# Altium PCB PCB.PcbDoc
Units mm, origin at the board's own origin, x right, y up, seen from the top; angles counter-clockwise.
Board outline 45 x 112 mm, 2 copper layers (Top Layer, Bottom Layer); 5 components, 29 nets, 156 pads, 0 vias.
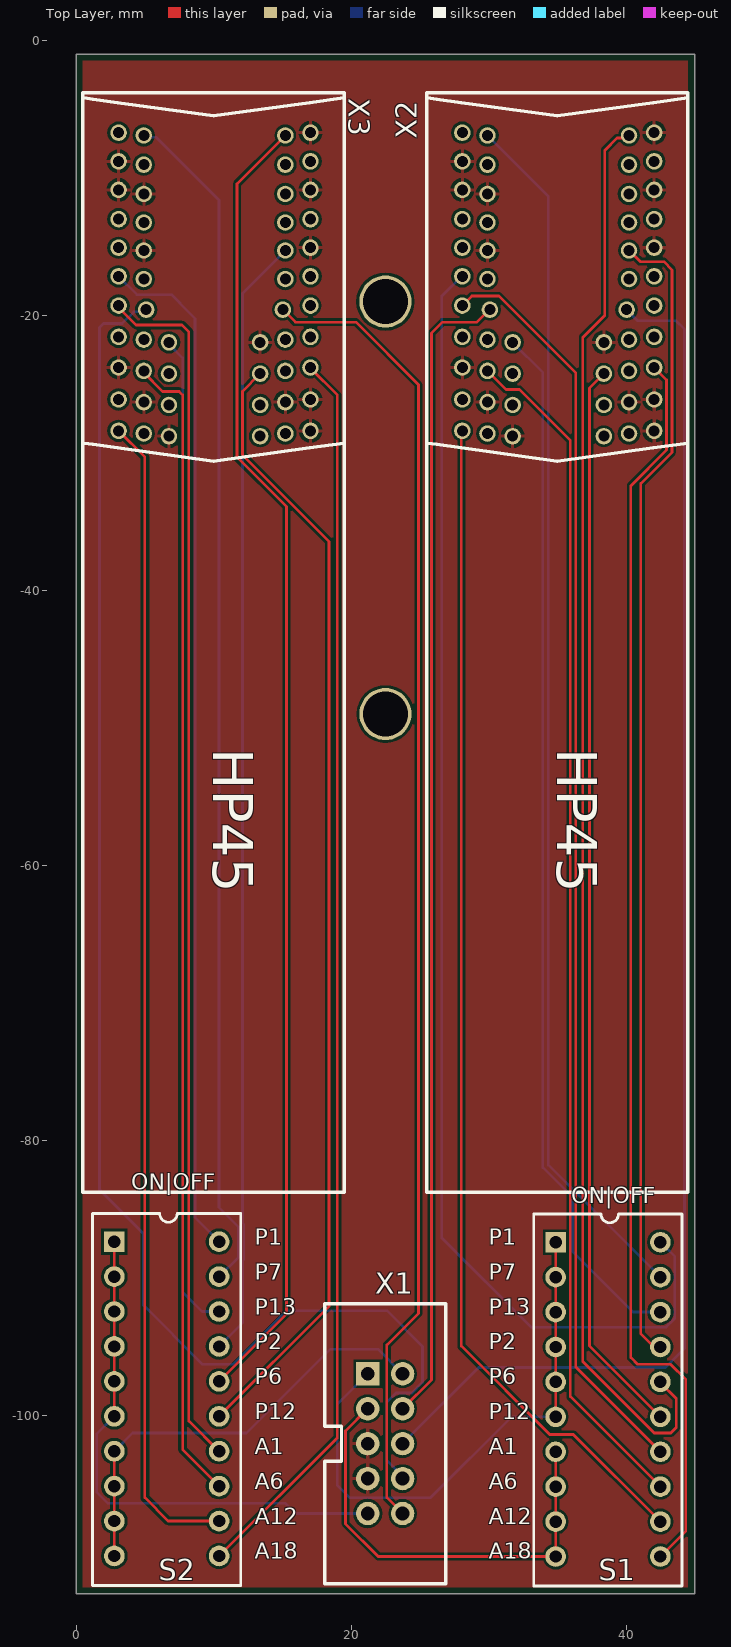
[diagram p0: Top Layer view]
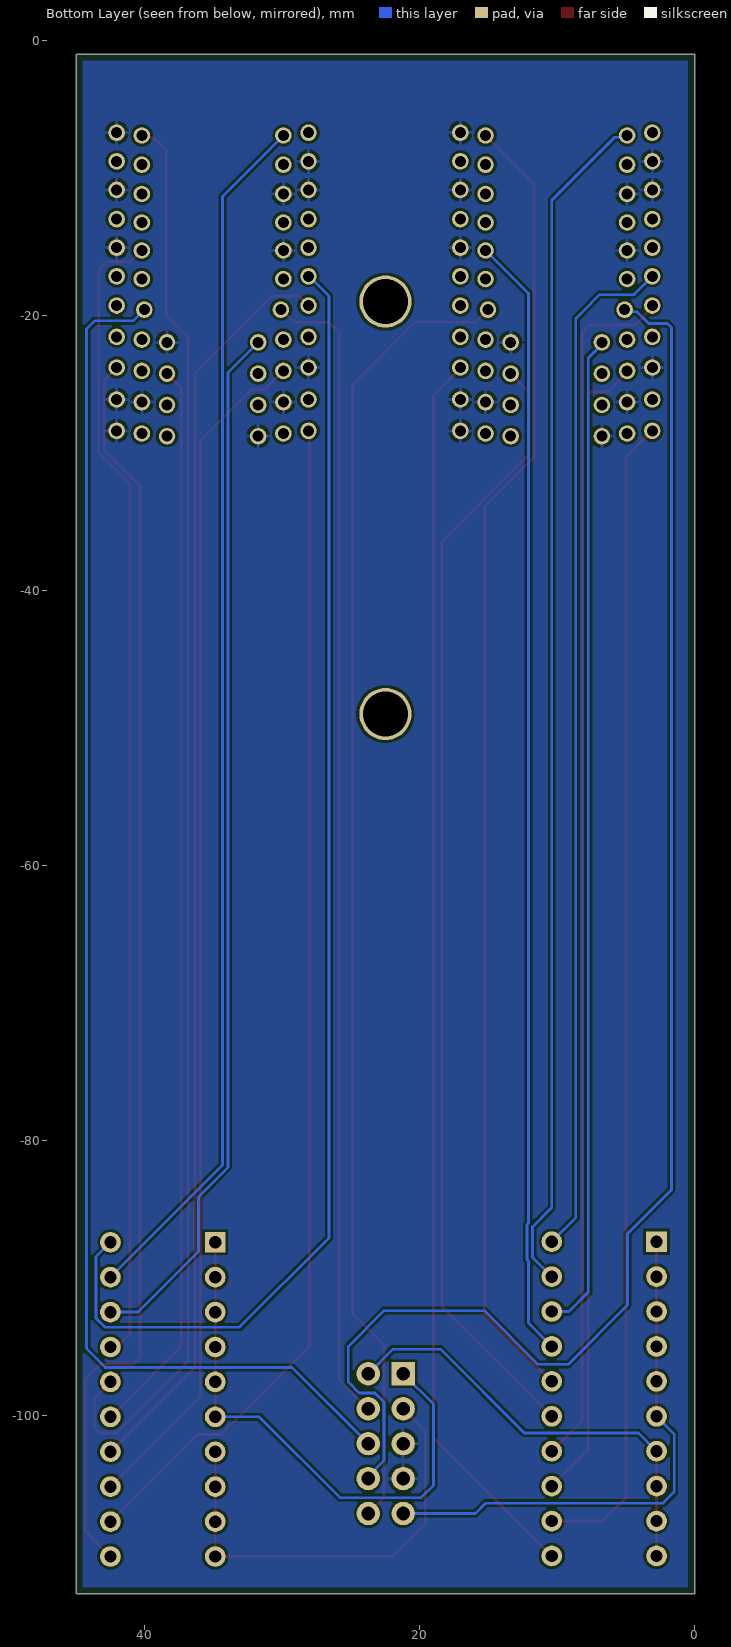
[diagram p1: Bottom Layer view, seen from below]

## Layer stack, top to bottom
Top Solder: solder mask 0.0102, Solder Resist, Dk 3.5
Top Layer: signal copper 0.0356
Dielectric 1: dielectric 0.32, FR-4, Dk 4.8
Bottom Layer: signal copper 0.0356
Bottom Solder: solder mask 0.0102, Solder Resist, Dk 3.5

## Board outline
0,-113 0,-1 45,-1 45,-113

## Design rules (kind name [scope] priority, off if disabled: settings)
Clearance [All] p1: gap=0.2 ignorepadtopadclearanceinfootprint=FALSE except(0: Arc-Hole Track-Hole SMDPad-Hole THPad-Hole Via-Hole Fill-Hole Poly-Hole Region-Hole Text-Hole)
PolygonConnect PolygonConnect_1 [IsVia] p1: connectstyle=Direct reliefconductorwidth=0.254 reliefentries=4 polygonreliefangle="90 Angle" airgapwidth=0.254
PolygonConnect [All] p2: connectstyle=Relief reliefconductorwidth=0.254 reliefentries=4 polygonreliefangle="90 Angle" airgapwidth=0.254
RoutingVias [All] p1: holewidth=0.711 width=1.27 viastyle="Through Hole" minholewidth=0.711 minwidth=1.27 maxholewidth=0.711 maxwidth=1.27
SolderMaskExpansion [All] p1: expansion=0.102 istentingtop=FALSE
Width [All] p1: maxlimit=0.2 minlimit=0.2 preferedwidth=0.2
30 further rules are at their usual default settings.

## Components (designator, comment, footprint, x,y, rotation, side; value= is the part's Value field where it differs from the comment)
S1 "SW-DIP10" DIP-20-KEY 34.88,-87.42 r270 top
S2 "SW-DIP10" DIP-20-KEY 2.78,-87.38 r270 top
X1 "IDC-10" IDC-10 22.48,-102.07 r0 top
X2 "HP45 pogo pin footprint" HP45 44.5,8.2 r180 top
X3 "HP45 pogo pin footprint" HP45 19.5,8.2 r180 top

## Footprints (in the part's own frame and the unit in brackets; to place one, negate y for a bottom-side part, rotate by r counter-clockwise, add the part's x,y. Pads: shape width x height; smd on the part's side, far side on the other; paste and mask are expansions set on the pad)
DIP-20-KEY [mm] "DIP; 16 Leads; Row Spacing 7.62 mm; Pitch 2.54 mm"
  rect 1.5x1.5 hole 0.9: 1(0,0)
  round 1.5 hole 0.9: 2(2.54,0) 3(5.08,0) 4(7.62,0) 5(10.16,0) 6(12.7,0) 7(15.24,0) 8(17.78,0) 9(20.32,0) 10(22.86,0) 11(22.86,7.62) 12(20.32,7.62) 13(17.78,7.62) 14(15.24,7.62) 15(12.7,7.62) 16(10.16,7.62) 17(7.62,7.62) 18(5.08,7.62) 19(2.54,7.62) 20(0,7.62)
  silkscreen extent -2.05,-1.59 25,9.2, body extent -2.29,-1.1 25.29,8.68, height 8.25
HP45 [mm]
  round 1.2 hole 0.8: 1(16.409,14.919) 2(2.45,14.919) 3(14.577,15.117) 4(4.281,15.117) 5(16.409,16.998) 6(2.45,16.998) 7(14.577,17.246) 8(4.281,17.246) 9(16.409,19.077) 10(2.45,19.077) 11(14.577,19.374) 12(4.281,19.374) 13(16.409,21.205) 14(2.45,21.206) 15(14.577,21.453) 16(4.281,21.453) 17(16.409,23.285) 18(2.45,23.285) 19(14.577,23.483) 20(4.281,23.483) 21(16.409,25.364) 22(2.45,25.364) 23(14.577,25.562) 24(4.281,25.562) 25(16.409,27.492) 26(2.45,27.492) 27(14.399,27.789) 28(4.46,27.789) 29(16.409,29.769) 30(2.45,29.769) 31(14.577,29.967) 32(4.281,29.967) 33(12.746,30.165) 34(6.113,30.165) 35(16.409,31.997) 36(2.45,31.997) 37(14.577,32.244) 38(4.281,32.244) 39(12.746,32.442) 40(6.113,32.442) 41(16.409,34.323) 42(2.45,34.323) 43(14.577,34.521) 44(4.281,34.521) 45(12.746,34.719) 46(6.113,34.719) 47(16.409,36.6) 48(2.45,36.6) 49(14.577,36.798) 50(4.281,36.798) 51(12.746,36.996) 52(6.113,36.996)
  silkscreen extent 0,12 19,92
IDC-10 [mm]
  rect 1.7x1.7 hole 1: 1(-1.27,5.08)
  round 1.7 hole 1: 2(1.27,5.08) 3(-1.27,2.54) 4(1.27,2.54) 5(-1.27,0) 6(1.27,0) 7(-1.27,-2.54) 8(1.27,-2.54) 9(-1.27,-5.08) 10(1.27,-5.08)
  silkscreen extent -4.4,-10.18 4.4,10.18, body extent -4.4,-10.1 4.45,10.2, height 8.73

## Part data
S1 S2: "4009 Series DIP Switch, Raised actuator", ComponentLink1Description="Manufacturer Link", ComponentLink1URL=http://www.oupiin.com/prodindx.html#Headers, LatestRevisionDate=17-Dec-2003, LatestRevisionNote="PCB Footprint replaced.", PackageDescription="DIP; 16 Leads; Row Spacing 7.62 mm; Pitch 2.54 mm", PackageReference=DIP-16-KEY, Published=24-Mar-1999, Publisher="Altium Limited"
X1: "разъем 4130"
X2 X3: library part HP45

## Free pads (board coordinates)
  round 3.8 hole 3.25: 153(22.5,-49) 153(22.5,-19)

## Nets (pads, with @x,y where several pads share a name; then routed paths per layer and width w, separated by ;. In a path a pad name is that pad's centre, name@x,y a point inside that pad or via, vN(x,y) a via of type N, cw(c..) or ccw(c..) an arc to the next point about the centre after c; other vN are vias at no path point)
A1: S1.14 X2.25 | length 91.9
  Top Layer w0.2: X2.25 28.783,-18.6 30.75,-18.6 36.35,-24.2 36.35,-63.339 36.35,-96.51 S1.14
A1A: S1.7 S1.8 S1.9 S1.10 X1.3 | length 32.9
  Top Layer w0.2: X1.3 19.6,-101.14 19.6,-107.9 21.98,-110.28 S1.10 S1.9 S1.8 S1.7
A1R: S2.14 X3.25 | length 88.3
  Top Layer w0.2: X3.25 3.091,-19.441 4.35,-20.7 7.7,-20.7 8.2,-21.2 8.2,-100.42 S2.14
A2A: S2.7 S2.8 S2.9 S2.10 X1.2 | length 32.4
  Top Layer w0.2: S2.10 S2.9 S2.8 S2.7
  Bottom Layer w0.2: S2.7 4.1,-101.3 12.4,-101.3 18.5,-95.2 21.96,-95.2 X1.2
A6: S1.13 X2.37 | length 86.9
  Top Layer w0.2: X2.37 31.278,-25.4 32.25,-25.4 35.95,-29.1 35.95,-63.779 35.95,-98.65 S1.13
A6R: S2.13 X3.37 | length 84.1
  Top Layer w0.2: X3.37 4.923,-24.173 6.3,-25.55 7.5,-25.55 7.75,-25.8 7.75,-102.51 S2.13
A12: S1.12 X2.47 | length 86.4
  Top Layer w0.2: X2.47 28.02,-28.471 28.02,-94.97 34.45,-101.4 36.16,-101.4 S1.12
A12R: S2.12 X3.47 | length 84.5
  Top Layer w0.2: X3.47 5,-30.309 5,-106 6.7,-107.7 S2.12
A18: S1.11 X2.36 | length 91.8
  Top Layer w0.2: X2.36 42.95,-24.697 42.95,-29.8 40.35,-32.4 40.35,-95.8 40.85,-96.3 43.25,-96.3 44.35,-97.4 44.35,-108.43 S1.11
A18R: S2.11 X3.36 | length 90.8
  Top Layer w0.2: S2.11 19,-101.64 19,-25.8 17.05,-23.85 X3.36
GND1: X1.5 X1.7 X2.2 X2.5 X2.9 X2.10 X2.11 X2.18 X2.19 X2.34 X2.35 X2.42 X2.43 X2.44 X2.48 X2.51 X3.2 X3.5 X3.9 X3.10 X3.11 X3.18 X3.19 X3.34 X3.35 X3.42 X3.43 X3.44 X3.48 X3.51
P1: S1.20 X2.21 | length 96.5
  Bottom Layer w0.2: X2.21 28.037,-17.164 26.6,-18.6 26.6,-87.1 33.1,-93.6 42.9,-93.6 43.55,-92.95 43.55,-88.47 S1.20
P1A: S1.1 S1.2 S1.3 S1.4 S1.5 S1.6 X1.1 | length 40.4
  Top Layer w0.2: S1.6 S1.5 S1.4 S1.3 S1.2 S1.1
  Bottom Layer w0.2: X1.1 19,-99.2 19,-105.1 19.9,-106 25.8,-106 31.68,-100.12 S1.6
P1R: S2.20 X3.21 | length 74.7
  Bottom Layer w0.2: X3.21 4.427,-18.5 6.933,-18.5 7.55,-19.117 7.55,-19.133 8.65,-20.233 8.65,-85.63 S2.20
P2: S1.17 X2.20 | length 83.9
  Top Layer w0.2: X2.20 41.036,-16.1 42.75,-16.1 43.35,-16.7 43.35,-29.966 41.08,-32.236 41.08,-94.08 42.04,-95.04 S1.17
P2A: S2.1 S2.2 S2.3 S2.4 S2.5 S2.6 X1.9 | length 39.1
  Top Layer w0.2: S2.6 S2.5 S2.4 S2.3 S2.2 S2.1
  Bottom Layer w0.2: S2.6 1.5,-101.36 1.5,-105.6 2.3,-106.4 15.2,-106.4 15.95,-107.15 X1.9
P2R: S2.17 X3.20 | length 82
  Top Layer w0.2: S2.17 S2.17@10.4,-94.8
  Bottom Layer w0.2: S2.17 12.1,-93.3 12.1,-88.786 12.2,-88.686 12.2,-86.134 12.1,-86.034 12.1,-18.401 X3.20
P6: S1.16 X2.4 | length 103.9
  Top Layer w0.2: X2.4 40.027,-7.108 39.342,-7.108 38.45,-8 38.45,-20 36.85,-21.6 36.85,-96.1 42.05,-101.3 43.25,-101.3 43.65,-100.9 43.65,-98.8 42.5,-97.65 S1.16
P6R: S2.16 X3.4 | length 95.6
  Top Layer w0.2: S2.16 15.3,-92.64 15.3,-33.916 11.7,-30.316 11.7,-10.436 X3.4
P7: S1.19 X2.3 | length 88.3
  Bottom Layer w0.2: X2.3 34.35,-11.345 34.35,-81.81 S1.19
P7R: S2.19 X3.3 | length 86.9
  Bottom Layer w0.2: X3.3 5.058,-7.052 5.823,-7.052 10.4,-11.63 10.4,-84.9 11.8,-86.3 11.8,-88.52 S2.19
P12: S1.15 X2.40 | length 78.4
  Top Layer w0.2: X2.40 37.35,-25.279 37.35,-94.97 S1.15
P12R: S2.15 X3.40 | length 82.3
  Top Layer w0.2: S2.15 18.4,-92.08 18.4,-36.45 12.1,-30.15 12.1,-25.529 X3.40
P13: S1.18 X2.33 | length 76.2
  Bottom Layer w0.2: X2.33 33.95,-24.161 33.95,-81.976 36.1,-84.126 36.1,-88.1 40.5,-92.5 S1.18
P13R: S2.18 X3.33 | length 72.7
  Bottom Layer w0.2: X3.33 6.754,-22.104 7.75,-23.1 7.75,-91.05 9.16,-92.46 S2.18
R10X1: X1.6 X2.28 | length 102.3
  Bottom Layer w0.2: X1.6 29.29,-96.53 42.87,-96.53 44.25,-95.15 44.25,-21 43.65,-20.4 40.851,-20.4 X2.28
R10X2: X1.10 X3.28 | length 95.7
  Top Layer w0.2: X3.28 15.951,-20.5 20.35,-20.5 24.9,-25.05 24.9,-92.6 22.6,-94.9 22.6,-106 X1.10
TSR1: X1.4 X2.27 | length 84.1
  Top Layer w0.2: X1.4 25.85,-97.43 25.85,-21.3 26.65,-20.5 29.15,-20.5 29.45,-20.2 29.45,-20.189 30.05,-19.589 X2.27
TSR2: X1.8 X3.27 | length 113
  Bottom Layer w0.2: X3.27 4.941,-19.749 4.201,-19.749 3.35,-20.6 2,-20.6 1.7,-20.9 1.7,-83.6 4.9,-86.8 4.9,-92 9.2,-96.3 11.4,-96.3 15.3,-92.4 22.6,-92.4 25.2,-95 25.2,-97.6 24.42,-98.38 23.274,-98.38 22.6,-99.054 22.6,-103.3 23.75,-104.45 X1.8
pads on no net: X2.1 X2.6 X2.7 X2.8 X2.12 X2.13 X2.14 X2.15 X2.16 X2.17 X2.22 X2.23 X2.24 X2.26 X2.29 X2.30 X2.31 X2.32 X2.38 X2.39 X2.41 X2.45 X2.46 X2.49 X2.50 X2.52 X3.1 X3.6 X3.7 X3.8 X3.12 X3.13 X3.14 X3.15 X3.16 X3.17 X3.22 X3.23 X3.24 X3.26 X3.29 X3.30 X3.31 X3.32 X3.38 X3.39 X3.41 X3.45 X3.46 X3.49 X3.50 X3.52

## Polygon pours and split planes (outlines as drawn)
GND1 on Top Layer "TOP" (solid, pour order 2): 0.5,-1.5 44.5,-1.5 44.5,-112.5 0.5,-112.5
GND1 on Bottom Layer "BOT" (solid, pour order 4): 0.5,-112.5 44.5,-112.5 44.5,-1.5 0.5,-1.5

## Silkscreen, mask and mechanical layers (free items; w line width, h text height)
Top Overlay:
  text "ON|OFF" at 4,-84 h2
  text "ON|OFF" at 36,-85 h2
  text "P1" at 13,-88 h2
  text "P1" at 30,-88 h2
  text "P7" at 13,-90.54 h2
  text "P7" at 30,-90.54 h2
  text "P13" at 13,-93.08 h2
  text "P13" at 30,-93.08 h2
  text "P2" at 13,-95.62 h2
  text "P2" at 30,-95.62 h2
  text "P6" at 13,-98.16 h2
  text "P6" at 30,-98.16 h2
  text "P12" at 13,-100.7 h2
  text "P12" at 30,-100.7 h2
  text "A1" at 13,-103.24 h2
  text "A1" at 30,-103.24 h2
  text "A6" at 13,-105.78 h2
  text "A6" at 30,-105.78 h2
  text "A12" at 13,-108.32 h2
  text "A12" at 30,-108.32 h2
  text "A18" at 13,-110.86 h2
  text "A18" at 30,-110.86 h2
Mechanical 1:
  the board outline again, w0.254

## Text inside footprints (layer, text, board x,y; h text height)
X2: Top Overlay "HP45" at 34,-51.5 h5 r270
X3: Top Overlay "HP45" at 9,-51.5 h5 r270